# EAGLE board BeagleQ-v02 (EAGLE 6.4)
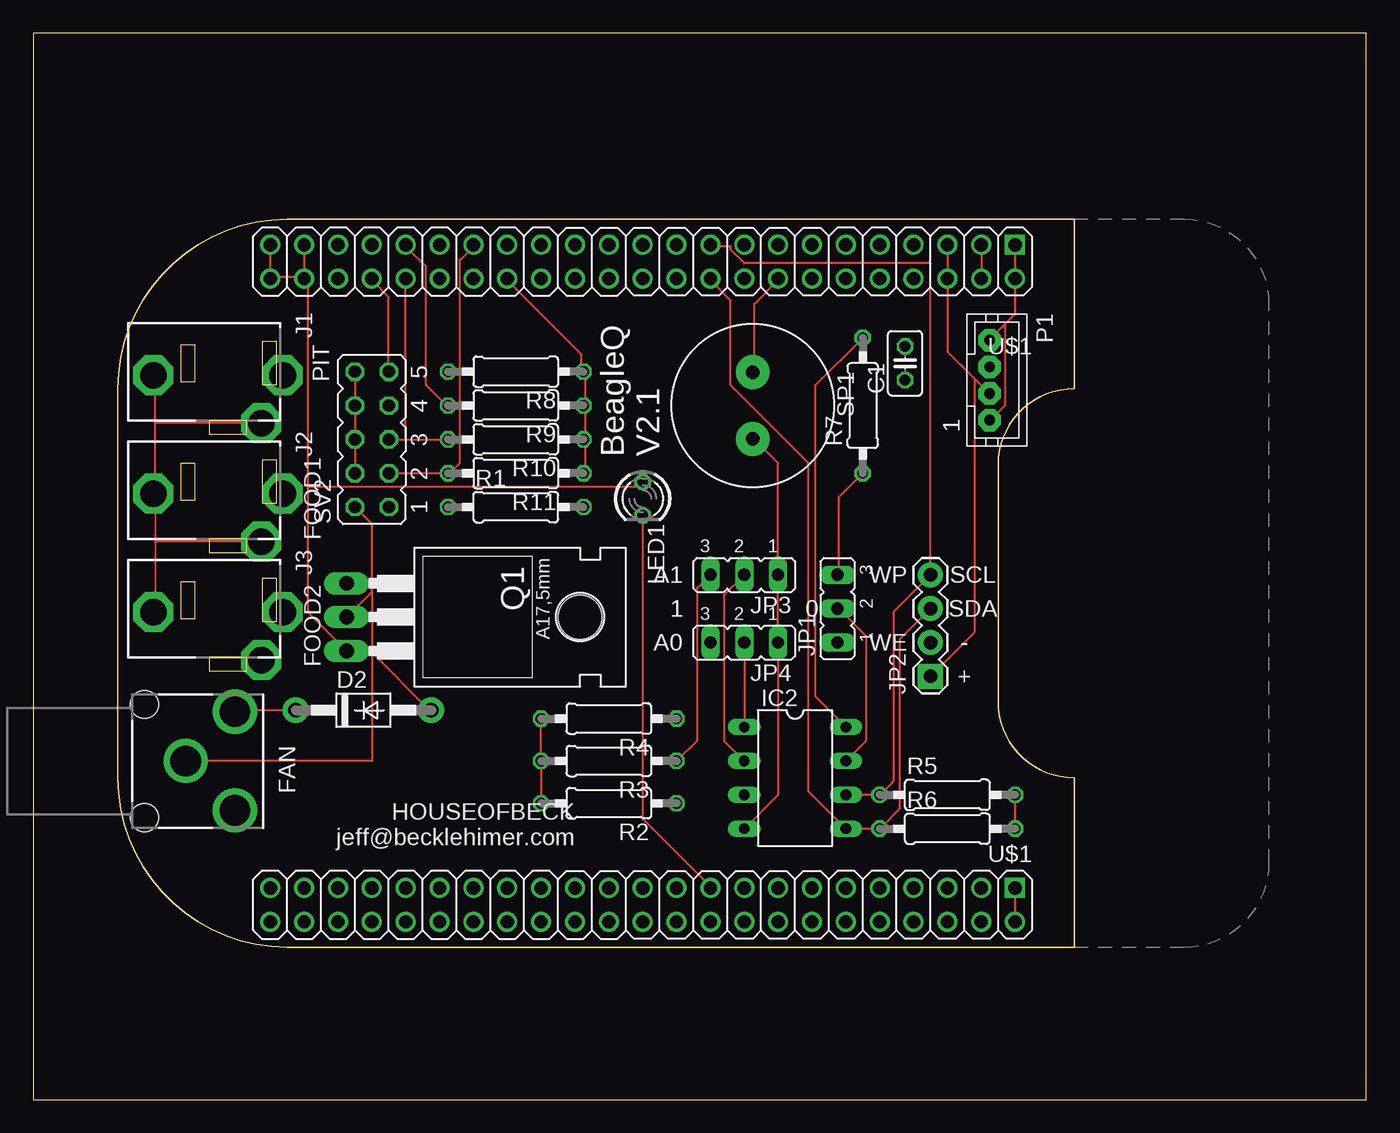
[diagram p0: board, top side]
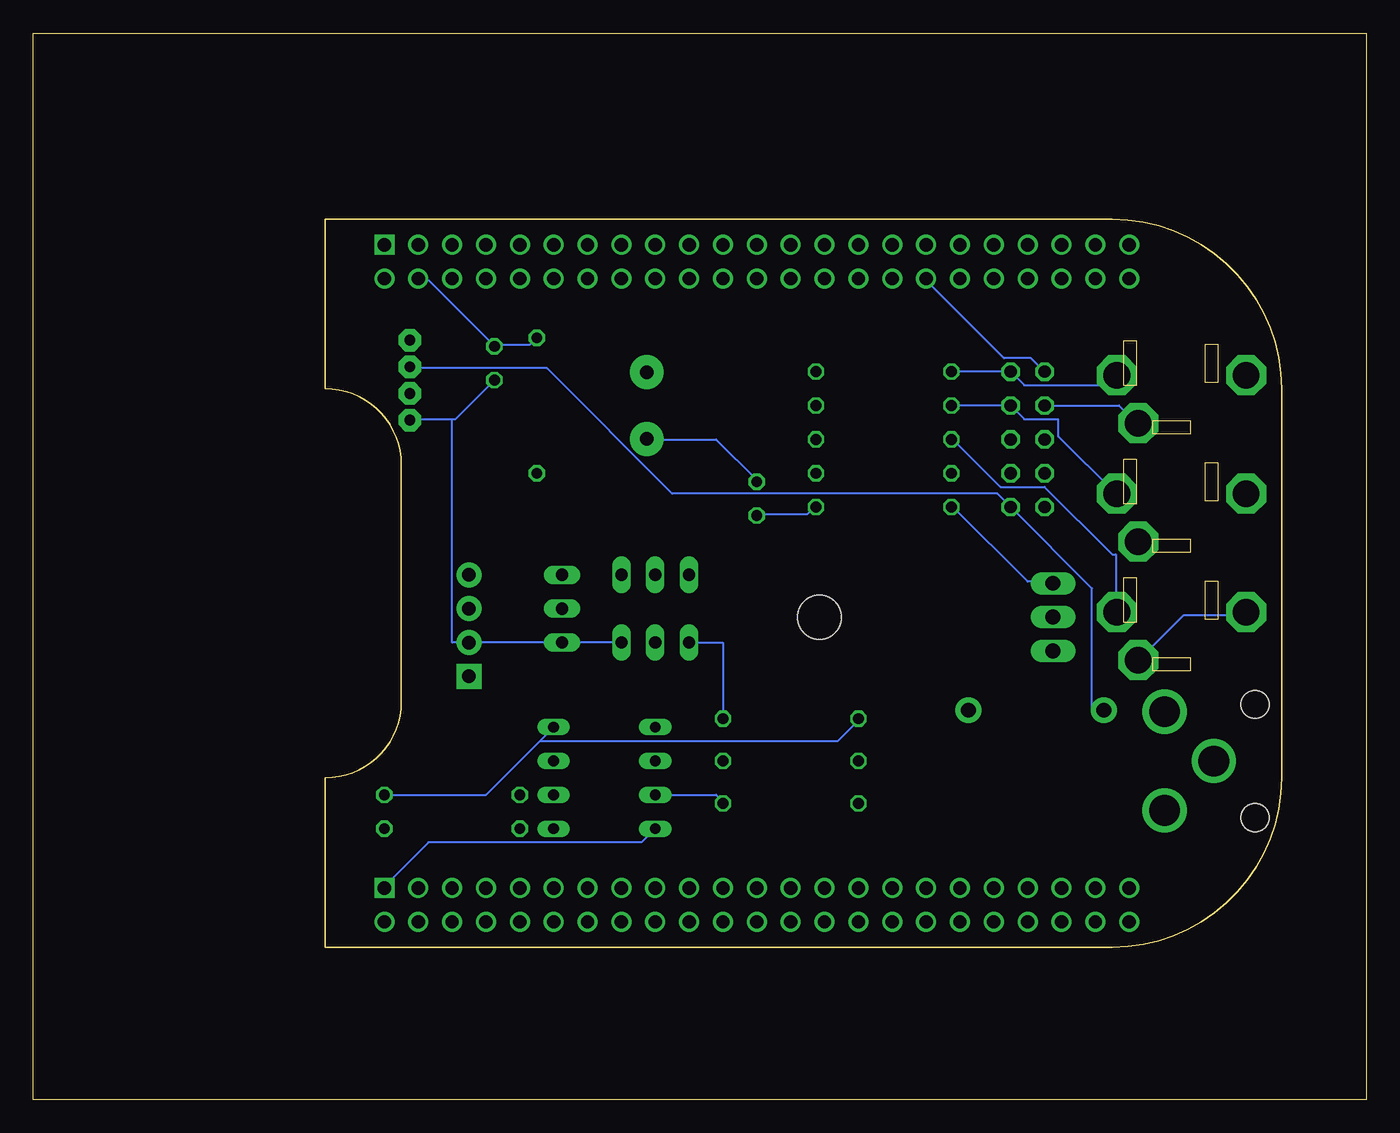
[diagram p1: board, bottom side, seen from below]

Size 100 x 80 mm. Coordinates in mm from the lower left corner, seen from the top.
Outline: 0,0 100,0 100,80 0,80 0,0
Copper layers (1*16): Top 0.0356mm / dielectric 1.5011mm / Bottom 0.0356mm
Design rules "LaenPCBOrder": minimum track width 6mil, minimum drill 13mil, track to track 6mil, track to pad 6mil, pad to pad 6mil, via to via 6mil, smd to smd 6mil, copper to edge 15mil, drill to drill 6mil, minimum pad ring 7mil, minimum via ring 7mil, stop-mask expansion 4mil, vias tented up to drill 0mil, thermal gap 10mil

## Footprints (pad centres in the part's own frame; a part is rotated, then mirrored left to right if it is on the bottom)
C025-025X050 = drill 0.813 octagon: 1 -1.27,0; 2 1.27,0
DO41-10 = drill 1.118 pad 1.93: A 5.08,0; C -5.08,0
DIL08 = drill 0.813 long: 1 -3.81,-3.81; 2 -1.27,-3.81; 3 1.27,-3.81; 4 3.81,-3.81; 5 3.81,3.81; 6 1.27,3.81; 7 -1.27,3.81; 8 -3.81,3.81
DCJ0202 = drill 2 pad 2.54 octagon: 1 0.9,-5.6; 2 0.9,4.1; 3 4.5,2.5
JP2 = drill 0.914 long: 1 -2.54,0; 2 0,0; 3 2.54,0
1X04 = drill 1.016 pad 1.88 square: 1 0,0 | drill 1.016 pad 1.88: 2 2.54,0; 3 5.08,0; 4 7.62,0
RCA = drill 2.3: PIN 3.7,3.7; SHELL 0,0; SWITCH 3.7,-3.7 | hole 2.1: -3.1,4.25; -3.1,-4.25
LED3MM = drill 0.813 octagon: A -1.27,0; K 1.27,0
JST-PH4 = drill 0.813 pad 1.676 octagon: 1 3,0; 2 1,0; 3 -1,0; 4 -3,0
TO220AH = drill 1.118 long: B -2.54,-6.35; C 0,-6.35; E 2.54,-6.35 | hole 3.302: 0,11.176
0207/10 = drill 0.813 octagon: 1 -5.08,0; 2 5.08,0
PS12 = drill 1 pad 2.54: P$1 -2.5,0; P$2 2.5,0
JP5Q = drill 0.914 octagon: 1 -5.08,-1.27; 2 -5.08,1.27; 3 -2.54,-1.27; 4 -2.54,1.27; 5 0,-1.27; 6 0,1.27; 7 2.54,-1.27; 8 2.54,1.27; 9 5.08,-1.27; 10 5.08,1.27
BEAGLEBONE_SHIELD = drill 1 square: 1 4.445,19.05; 47 52.705,19.05 | drill 1: 2 1.905,19.05; 3 4.445,21.59; 4 1.905,21.59; 5 4.445,24.13; 6 1.905,24.13; 7 4.445,26.67; 8 1.905,26.67; 9 4.445,29.21; 10 1.905,29.21; 11 4.445,31.75; 12 1.905,31.75; 13 4.445,34.29; 14 1.905,34.29; 15 4.445,36.83; 16 1.905,36.83; 17 4.445,39.37; 18 1.905,39.37; 19 4.445,41.91; 20 1.905,41.91; 21 4.445,44.45; 22 1.905,44.45; 23 4.445,46.99; 24 1.905,46.99; 25 4.445,49.53; 26 1.905,49.53; 27 4.445,52.07; 28 1.905,52.07; 29 4.445,54.61; 30 1.905,54.61; 31 4.445,57.15; 32 1.905,57.15; 33 4.445,59.69; 34 1.905,59.69; 35 4.445,62.23; 36 1.905,62.23; 37 4.445,64.77; 38 1.905,64.77; 39 4.445,67.31; 40 1.905,67.31; 41 4.445,69.85; 42 1.905,69.85; 43 4.445,72.39; 44 1.905,72.39; 45 4.445,74.93; 46 1.905,74.93; 48 50.165,19.05; 49 52.705,21.59; 50 50.165,21.59; 51 52.705,24.13; 52 50.165,24.13; 53 52.705,26.67; 54 50.165,26.67; 55 52.705,29.21; 56 50.165,29.21; 57 52.705,31.75; 58 50.165,31.75; 59 52.705,34.29; 60 50.165,34.29; 61 52.705,36.83; 62 50.165,36.83; 63 52.705,39.37; 64 50.165,39.37; 65 52.705,41.91; 66 50.165,41.91; 67 52.705,44.45; 68 50.165,44.45; 69 52.705,46.99; 70 50.165,46.99; 71 52.705,49.53; 72 50.165,49.53; 73 52.705,52.07; 74 50.165,52.07; 75 52.705,54.61; 76 50.165,54.61; 77 52.705,57.15; 78 50.165,57.15; 79 52.705,59.69; 80 50.165,59.69; 81 52.705,62.23; 82 50.165,62.23; 83 52.705,64.77; 84 50.165,64.77; 85 52.705,67.31; 86 50.165,67.31; 87 52.705,69.85; 88 50.165,69.85; 89 52.705,72.39; 90 50.165,72.39; 91 52.705,74.93; 92 50.165,74.93

## Placement (x,y rotation side)
C1  [C025-025X050]  65.41,55.24 90 top
D2  1N4004  [DO41-10]  24.77,29.21 0 top
IC2  AT24CP  [DIL08]  57.15,24.13 270 top
J1  DCJ0202  [DCJ0202]  14.61,55.24 270 top
J2  DCJ0202  [DCJ0202]  14.61,46.35 270 top
J3  DCJ0202  [DCJ0202]  14.61,37.47 270 top
JP1  [JP2]  60.33,36.83 90 top
JP2  [1X04]  67.31,31.75 90 top
JP3  [JP2]  53.34,39.37 180 top
JP4  [JP2]  53.34,34.29 180 top
JP5  RCA  [RCA]  11.43,25.4 0 top
LED1  [LED3MM]  45.72,45.09 270 top
P1  [JST-PH4]  71.75,53.98 270 top
Q1  TIP120  [TO220AH]  29.84,36.2 270 top
R1  2.7k  [0207/10]  36.2,44.45 0 top
R2  4.7k  [0207/10]  43.18,22.23 180 top
R3  4.7k  [0207/10]  43.18,25.4 180 top
R4  4.7k  [0207/10]  43.18,28.57 180 top
R5  5.6k  [0207/10]  68.58,22.86 0 top
R6  5.6k  [0207/10]  68.58,20.32 0 top
R7  10k  [0207/10]  62.23,52.07 90 top
R8  10k  [0207/10]  36.2,54.61 180 top
R9  10k  [0207/10]  36.2,52.07 180 top
R10  10k  [0207/10]  36.2,49.53 180 top
R11  10k  [0207/10]  36.2,46.99 180 top
SP1  SPEAKER/PS12  [PS12]  53.98,52.07 270 top
SV2  Probes  [JP5Q]  25.4,49.53 90 top
U$1  BEAGLEBONE_OUTLINE  [BEAGLEBONE_SHIELD]  92.71,11.43 90 top

## Library data of the parts
C1 = rcl
D2 SP1 U$1 = adafruit
IC2 = atmel; MPN: AT24C1024BW-SH-B; OC_FARNELL: 1362646; OC_NEWARK: 03P2044
J1-J3 = houseofbeck
JP1 JP3 JP4 SV2 = jumper
JP2 JP5 = SparkFun-Connectors
LED1 = led
P1 = jst-ph
Q1 = transistor-power
R1-R11 = resistor

## Nets
AIN0: U$1.85
AIN1: J1.2 R8.2 SV2.9 U$1.86
AIN2: J2.2 R9.2 SV2.7 U$1.83
AIN3: J3.2 R10.2 SV2.5 U$1.84
AIN4: R11.2 SV2.3 U$1.79
BLOWER_H: D2.C JP5.PIN P1.3 SV2.1
BLOWER_L: D2.A JP5.SHELL Q1.C SV2.2
EHRPWM1A: U$1.60
EHRPWM1B: SP1.P$1 U$1.62
EHRPWM2A: LED1.K R1.2 U$1.19
GND: C1.1 IC2.4 JP1.1 JP2.2 JP3.1 JP4.1 LED1.A P1.1 P1.4 Q1.E SP1.P$2 U$1.1 U$1.2 U$1.47 U$1.48 U$1.89 U$1.90 U$1.91 U$1.92
GNDA_ADC: J1.1 J1.3 J2.1 J2.3 J3.1 J3.3 SV2.4 SV2.6 SV2.8 SV2.10 U$1.80
GPIO1_28: U$1.58
I2C2_SCL: IC2.6 JP2.4 R5.1 U$1.65
I2C2_SDA: IC2.5 JP2.3 R6.1 U$1.66
N$1: IC2.2 JP3.2
N$2: IC2.1 JP4.2
N$3: IC2.7 JP1.2
N$4: Q1.B R1.1
N$5: JP1.3 R7.1
N$6: JP3.3 R3.1
N$7: JP4.3 R4.1
N$9: IC2.3 R2.1
SYS_5V: U$1.53
VDD: JP2.1 P1.2 U$1.51 U$1.52
VDD_3V: C1.2 IC2.8 R2.2 R3.2 R4.2 R5.2 R6.2 R7.2 U$1.49 U$1.50
VDD_ADC: R8.1 R9.1 R10.1 R11.1 U$1.78

## Tracks (layer width: path | path; a pad name or v marks a point on that pad's centre or on a via)
AIN1
  Top 0.152: SV2.9 26.67,60.2 25.4,61.47 U$1.86
  Bottom 0.152: R8.2 SV2.9 25.65,53.59 19.3,53.59 18.8,54.1 J1.2
AIN2
  Top 0.152: U$1.83 27.94,64.01 29.46,62.48 29.46,53.59 30.99,52.07 R9.2
  Bottom 0.152: R9.2 SV2.7 25.65,51.05 23.11,51.05 23.11,49.78 18.8,45.47 J2.2
AIN3
  Top 0.152: SV2.5 27.94,49.53 | 27.94,49.53 R10.2 | 27.94,49.53 U$1.84
  Bottom 0.152: J3.2 18.8,36.58 18.8,40.89 19.05,40.89 24.13,45.97 27.43,45.97 30.99,49.53 R10.2
AIN4
  Top 0.152: SV2.3 R11.2 31.24,46.99 32,47.75 32,62.99 33.02,64.01 U$1.79
BLOWER_H
  Top 0.152: D2.C 15.24,29.21 JP5.PIN
  Bottom 0.152: D2.C 20.57,29.21 20.57,38.35 SV2.1 27.69,45.47 52.07,45.47 61.47,54.86 71.63,54.86 P1.3
BLOWER_L
  Top 0.152: SV2.2 25.4,43.18 25.4,38.1 | Q1.C 25.4,38.1 | 25.4,33.53 29.72,29.21 D2.A | 25.4,38.1 25.4,33.53 | JP5.SHELL 25.4,25.4 25.4,33.53
EHRPWM1B
  Top 0.152: U$1.62 55.88,61.47 54.1,59.69 54.1,54.61 SP1.P$1
EHRPWM2A
  Top 0.152: LED1.K 45.72,21.08 50.8,16 U$1.19
  Bottom 0.152: R1.2 41.4,44.45 41.91,43.94 45.72,43.94 LED1.K
GND
  Top 0.152: U$1.91 17.78,61.72 | U$1.89 20.32,61.72 | Q1.E 20.57,36.58 20.57,45.97 | 20.57,45.97 20.57,61.21 20.32,61.47 U$1.90 20.32,61.72 | 20.32,61.72 17.78,61.72 | 17.78,61.72 U$1.92 | U$1.47 U$1.48 73.66,58.93 72.9,58.17 | 72.9,58.17 71.88,57.15 P1.4 | 72.9,58.17 72.9,52.07 71.88,51.05 P1.1 | U$1.1 U$1.2 | IC2.4 55.88,22.86 JP4.1 JP3.1 55.88,47.75 54.1,49.53 SP1.P$2 | 20.57,45.97 45.72,45.97 LED1.A
  Bottom 0.152: C1.1 68.33,51.05 68.58,51.05 | 68.58,51.05 71.63,51.05 P1.1 | LED1.A 45.72,46.48 48.77,49.53 53.85,49.53 SP1.P$2 | JP4.1 JP1.1 JP2.2 68.58,34.29 68.58,51.05 | IC2.4 54.36,19.3 70.36,19.3 73.66,16 U$1.1
GNDA_ADC
  Top 0.152: SV2.4 SV2.6 SV2.8 SV2.10 | 9.14,41.91 9.14,45.21 J2.1 9.14,45.47 9.14,50.8 | 9.14,41.91 9.14,36.58 J3.1 | 9.14,41.91 17.02,41.91 J2.3 | 9.14,50.8 9.14,54.1 J1.1 | 9.14,50.8 17.02,50.8 J1.3
  Bottom 0.152: SV2.10 25.15,55.63 27.18,55.63 33.02,61.47 U$1.80 | SV2.8 18.54,52.07 17.27,50.8 J1.3 | J3.3 17.02,33.02 13.72,36.32 9.14,36.32 J3.1
I2C2_SCL
  Top 0.152: IC2.6 R5.1 64.52,23.88 64.52,36.58 JP2.4 67.31,62.74 53.34,62.74 52.32,63.75 52.32,64.01 50.8,64.01 U$1.65
I2C2_SDA
  Top 0.152: U$1.66 50.8,61.47 52.32,59.94 52.32,53.59 58.17,47.75 58.17,23.11 IC2.5 R6.1 65.02,21.84 65.02,34.54 JP2.3
N$1
  Top 0.152: IC2.2 51.82,26.92 51.82,37.85 JP3.2
N$2
  Top 0.152: JP4.2 IC2.1
N$3
  Top 0.152: IC2.7 62.48,26.92 62.48,34.8 60.45,36.83 JP1.2
N$4
  Bottom 0.152: R1.1 30.99,44.45 25.4,38.86 23.62,38.86 Q1.B
N$5
  Top 0.152: R7.1 60.45,45.21 60.45,39.37 JP1.3
N$6
  Top 0.152: R3.1 49.78,26.92 49.78,38.35 JP3.3
N$7
  Bottom 0.152: R4.1 48.26,34.29 JP4.3
N$9
  Bottom 0.152: IC2.3 48.77,22.86 48.26,22.35 R2.1
VDD
  Top 0.152: U$1.51 U$1.52 68.58,56.13 70.61,54.1 | 70.61,54.1 71.63,53.09 P1.2 | JP2.1 70.61,35.05 70.61,54.1
VDD_3V
  Top 0.152: U$1.49 U$1.50 | R2.2 R3.2 R4.2 | R5.2 R6.2 | R7.2 58.67,53.59 58.67,30.23 IC2.8
  Bottom 0.152: R7.2 62.74,56.64 65.28,56.64 C1.2 70.36,61.47 71.12,61.47 U$1.50 | 61.98,26.92 66.04,22.86 R5.2 | 61.98,26.92 IC2.8 | 61.98,26.92 39.62,26.92 38.1,28.45 R4.2
VDD_ADC
  Top 0.152: 41.4,49.53 41.4,46.99 R11.1 | 41.4,52.07 41.4,54.61 R8.1 41.15,54.61 41.15,55.88 35.56,61.47 U$1.78 | 41.4,52.07 41.4,49.53 | 41.4,49.53 R10.1 | 41.4,52.07 R9.1

## Text on the board
tPlace: PIT | BeagleQ / V2.1 | FOOD1 | A1 | WP | SCL | 1 | 0 | SDA | FOOD2 | A0 | WE | - | + | FAN | HOUSEOFBECK / jeff@becklehimer.com